# Altium PCB Temp Sensirion assy FPC.PcbDoc
Units mm, origin at the board's own origin, x right, y up, seen from the top; angles counter-clockwise.
Board outline 52.31 x 81.5 mm, 2 copper layers (Top Layer, Bottom Layer), stack 1 mm thick; 2 components, 4 nets, 16 pads, 5 vias.
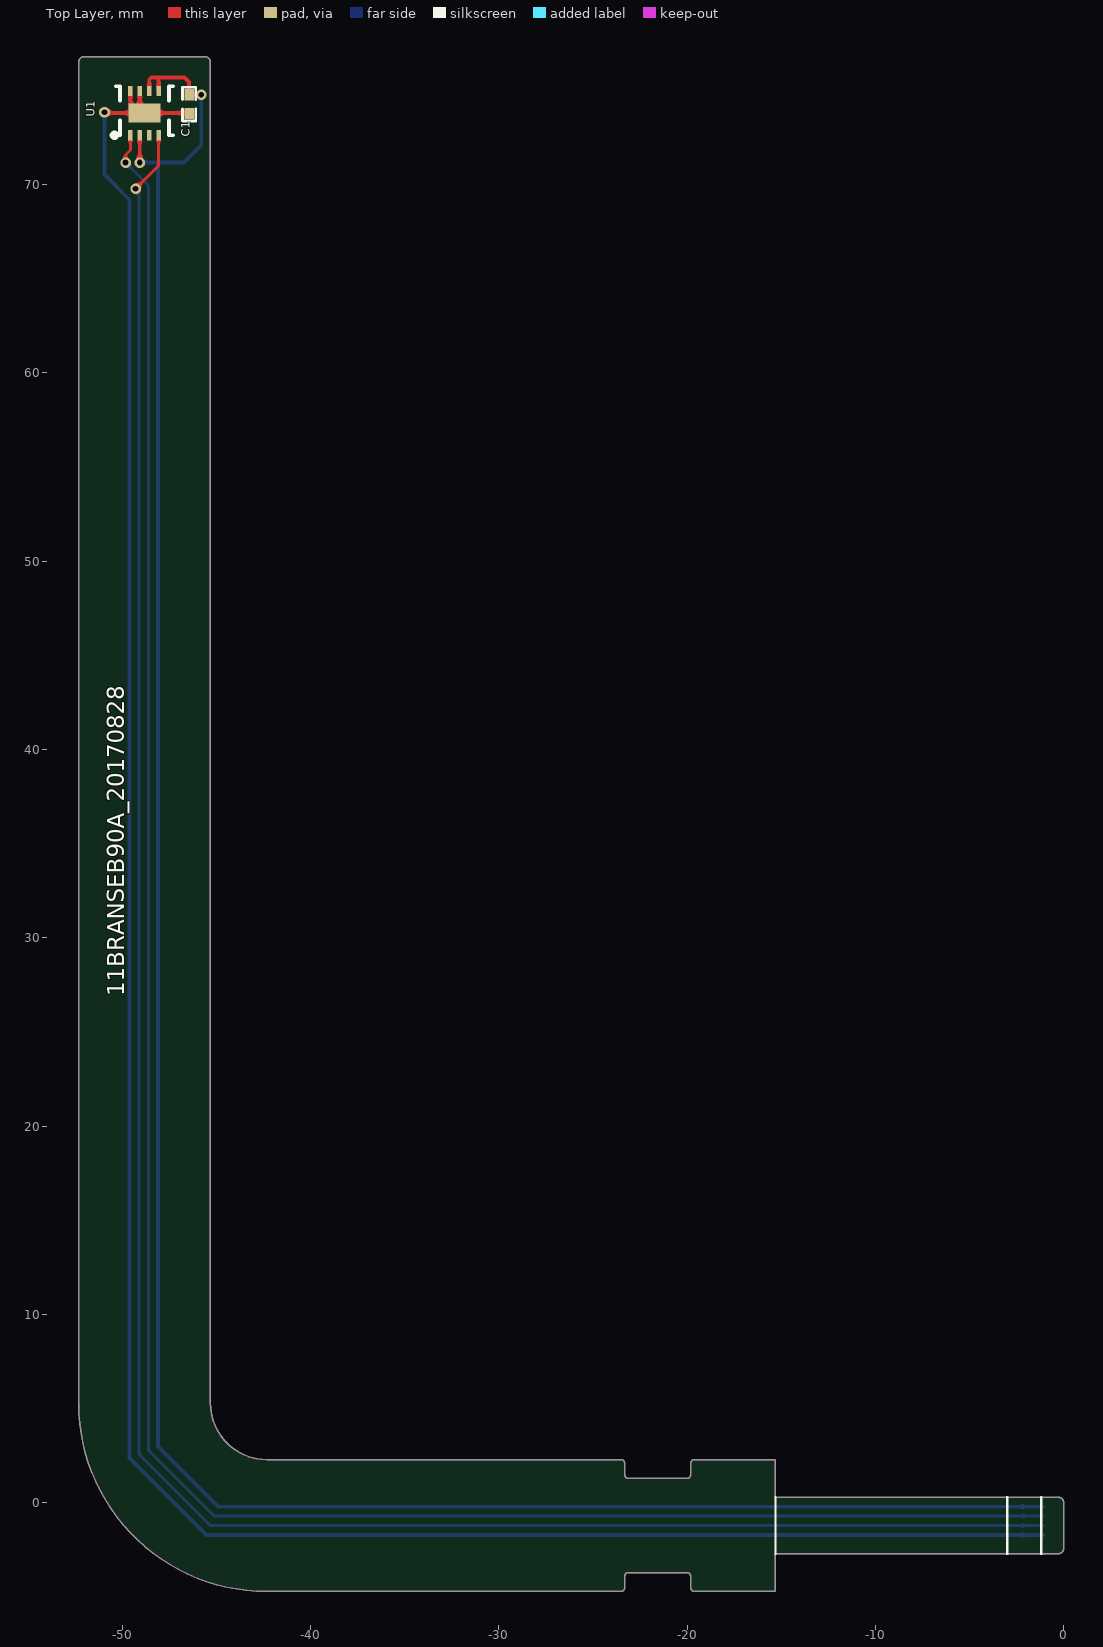
[diagram p0: Top Layer view]
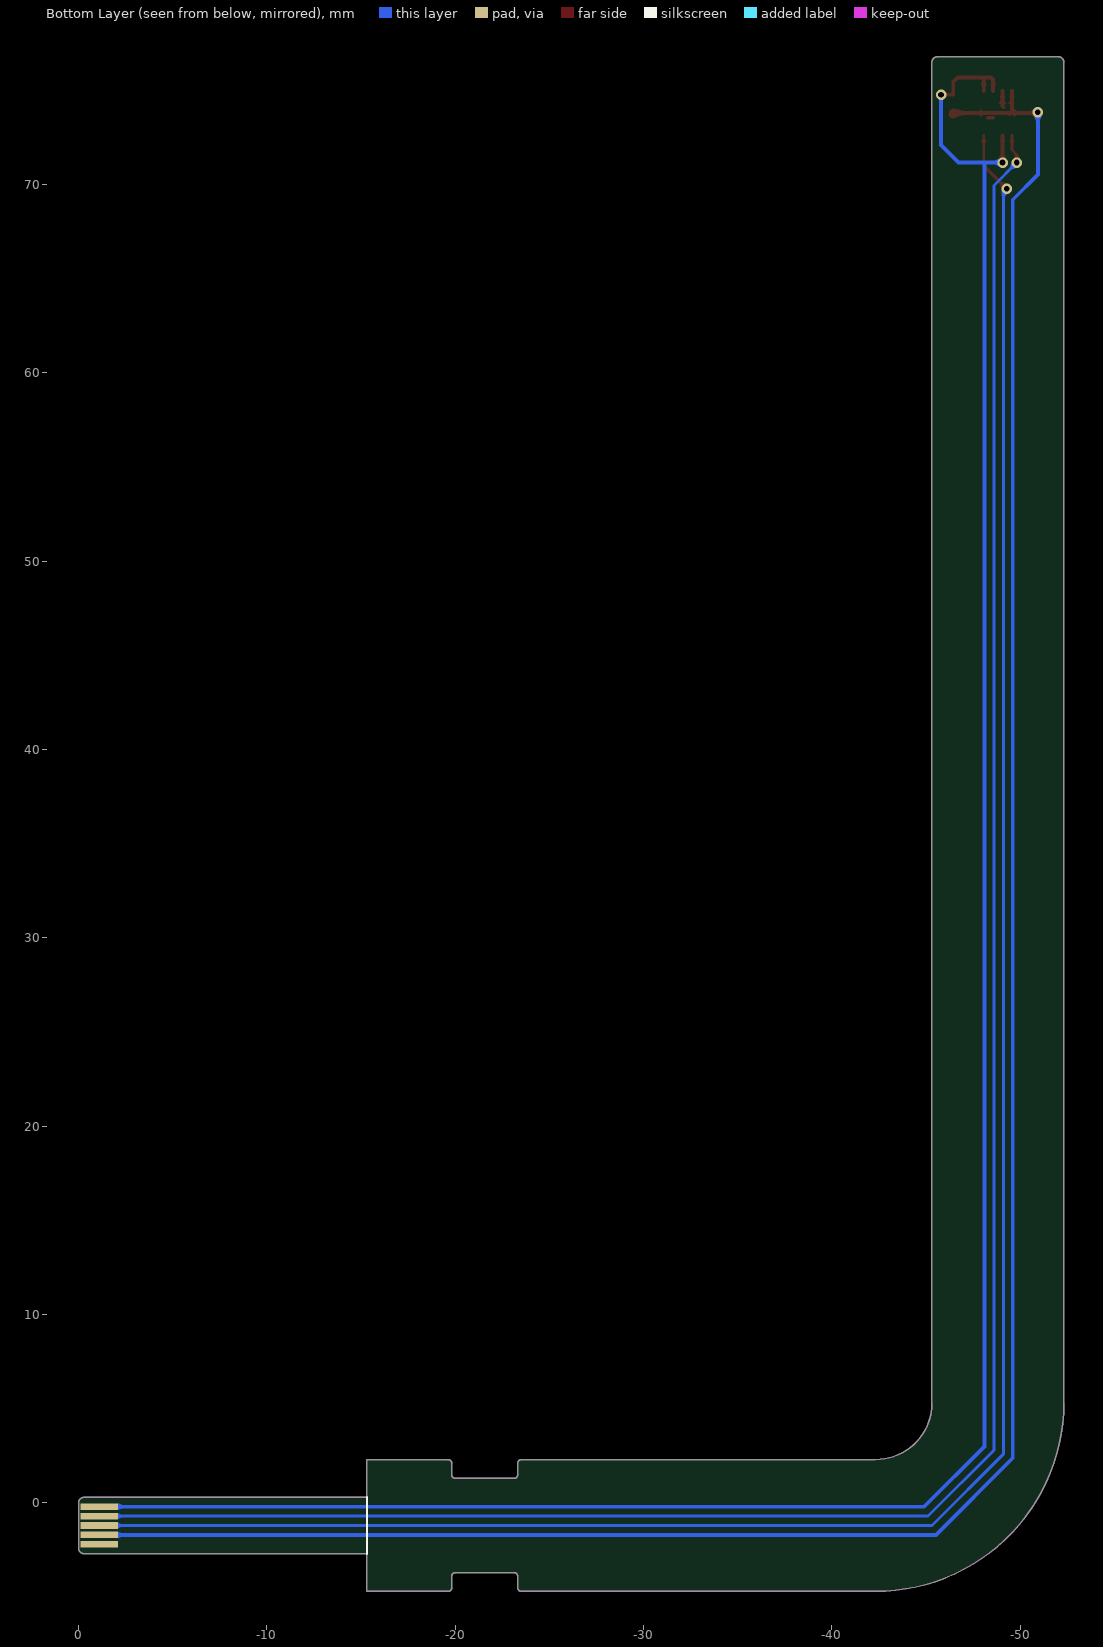
[diagram p1: Bottom Layer view, seen from below]

## Layer stack, top to bottom
Top Solder: solder mask 0.0102, Solder Resist, Dk 3.5
Top Layer: signal copper 0.0356
Dielectric1: core 0.929, FR-4, Dk 4.8
Bottom Layer: signal copper 0.0356
Bottom Solder: solder mask 0.0102, Solder Resist, Dk 3.5

## Board outline
-42.314,-4.7 -23.514,-4.7 ccw(c-23.514,-4.5) -23.314,-4.5 -23.314,-3.9 cw(c-23.114,-3.9) -23.114,-3.7 -20.014,-3.7 cw(c-20.014,-3.9) -19.814,-3.9 -19.814,-4.5 ccw(c-19.614,-4.5) -19.614,-4.7 -15.314,-4.7 -15.314,-2.7 -0.3,-2.7 ccw(c-0.3,-2.4) 0,-2.4 0,0 ccw(c-0.3,0) -0.3,0.3 -15.314,0.3 -15.314,2.3 -19.614,2.3 ccw(c-19.614,2.1) -19.814,2.1 -19.814,1.5 cw(c-20.014,1.5) -20.014,1.3 -23.114,1.3 cw(c-23.114,1.5) -23.314,1.5 -23.314,2.1 ccw(c-23.514,2.1) -23.514,2.3 -42.314,2.3 cw(c-42.314,5.3) -45.314,5.3 -45.314,76.5 ccw(c-45.614,76.5) -45.614,76.8 -52.014,76.8 ccw(c-52.014,76.5) -52.314,76.5 -52.314,5.3 ccw(c-42.314,5.3)

## Design rules (kind name [scope] priority, off if disabled: settings)
Clearance [All] p1: gap=0.152
MinimumSolderMaskSliver [All] p1: minsoldermaskwidth=0
PlaneConnect [All] p1: planeconnectstyle=Relief reliefexpansion=0.508 reliefentries=2 reliefconductorwidth=0.254 reliefairgap=0.254
PolygonConnect [All] p1: connectstyle=Direct reliefconductorwidth=0.254 reliefentries=4 polygonreliefangle="90 Angle" airgapwidth=0.254
RoutingVias [All] p1: holewidth=0.711 width=1.27 viastyle="Through Hole" minholewidth=0.711 minwidth=1.27 maxholewidth=0.711 maxwidth=1.27
SilkToSilkClearance [All] p1: silktosilkclearance=0
SilkToSolderMaskClearance [IsPad] p1: minsilkscreentomaskgap=0 clearancetoexposedcopper=TRUE
SolderMaskExpansion [All] p1: expansion=0.102
Width [All] p1: maxlimit=2.54 minlimit=0.152 preferedwidth=0.254
26 further rules are at their usual default settings.

## Components (designator, comment, footprint, x,y, rotation, side; value= is the part's Value field where it differs from the comment)
C1 "0.1uF/10V" 0402C -46.443,74.273 r270 top
U1 "SHT31" DFN -48.814,73.8 r0 top locked

## Footprints (in the part's own frame and the unit in brackets; to place one, negate y for a bottom-side part, rotate by r counter-clockwise, add the part's x,y. Pads: shape width x height; smd on the part's side, far side on the other; paste and mask are expansions set on the pad)
0402C [mm]
  rect 0.6x0.5 smd: 1(-0.5,0) 2(0.5,0)
  silkscreen extent -0.9,-0.35 0.9,0.35, body extent -0.51,-0.25 0.51,0.25, height 0.5
DFN [mm]
  rect 0.25x0.55 smd: 1(-0.75,-1.175) 2(-0.25,-1.175) 3(0.25,-1.175) 4(0.75,-1.175) 5(0.75,1.175) 6(0.25,1.175) 7(-0.25,1.175) 8(-0.75,1.175)
  rect 1.7x1 smd: 9(0,0)
  silkscreen extent -1.72,-1.3 1.53,1.43, body extent -1.48,-1.55 1.51,1.55, height 1

## Part data
C1: library part CAP, "厂家：Murata，型号：GRM155R71A104KA01D"
U1: "厂家：盛思睿，型号：SHT31"

## Free pads (board coordinates)
  rect 2x0.35 smd far side: 1(-1.104,-0.2) 2(-1.104,-0.7) 3(-1.104,-1.2) 4(-1.104,-1.7) 5(-1.104,-2.2)

## Via types
v1: diameter 0.559, hole 0.305, Top Layer to Bottom Layer, tented both sides, 5 vias

## Nets (pads, with @x,y where several pads share a name; then routed paths per layer and width w, separated by ;. In a path a pad name is that pad's centre, name@x,y a point inside that pad or via, vN(x,y) a via of type N, cw(c..) or ccw(c..) an arc to the next point about the centre after c; other vN are vias at no path point)
3.3V: C1.1 pad.1 U1.2 U1.5 U1.6 | length 129.2
  Top Layer w0.203: v1(-49.064,71.174) U1.2 ; U1.6 -48.564,75.581 -48.449,75.695 -48.1,75.695 ; U1.5 -48.064,75.659 -48.1,75.695 ; v1(-45.797,74.773) C1.1 -46.443,75.443 -46.695,75.695 -48.1,75.695
  Bottom Layer w0.203: v1(-49.064,71.174) -48.104,71.174 ; v1(-45.797,74.773) -45.797,72.103 -46.726,71.174 -48.104,71.174 ; pad.1 -44.906,-0.2 -48.104,2.998 -48.104,71.174
GND: C1.2 pad.4 U1.7 U1.8 U1.9 | length 129.2
  Top Layer w0.203: v1(-50.939,73.841) -50.898,73.8 U1.9@-49.501,73.8 ; U1.8 -49.564,73.864 U1.9@-49.501,73.8 ; U1.9@-49.44,73.739 U1.9@-49.501,73.8 ; U1.9@-49.122,74.108 -49.064,74.166 U1.7 ; U1.9@-48.564,73.55 U1.9@-48.285,73.55 ; C1.2@-46.47,73.8 U1.9 U1.9@-49.501,73.8
  Top Layer w0.508: C1.2@-46.47,73.8 C1.2
  Bottom Layer w0.203: v1(-50.939,73.841) -50.939,70.535 -49.604,69.2 -49.604,2.377 -45.527,-1.7 pad.4
T_SCL: pad.3 U1.4 | length 120.2
  Top Layer w0.152: v1(-49.288,69.783) -48.064,71.007 U1.4
  Bottom Layer w0.152: v1(-49.288,69.783) -49.104,69.599 -49.104,2.584 -45.32,-1.2 pad.3
T_SDA: pad.2 U1.1 | length 119.4
  Top Layer w0.152: v1(-49.821,71.174) -49.821,71.58 -49.564,71.837 U1.1
  Bottom Layer w0.152: v1(-49.821,71.174) -48.604,69.957 -48.604,2.791 -45.113,-0.7 pad.2
pads on no net: U1.3

## Keep-outs
Keep-Out Layer:
  the board outline again, w0.013

## Silkscreen, mask and mechanical layers (free items; w line width, h text height)
Top Overlay:
  lines w0.127: -15.31,-2.7 -15.31,0.3 ; -3,-2.7 -3,0.3 ; -1.2,-2.7 -1.2,0.3
  text "11BRANSEB90A_20170828" at -49.604,26.9 h1.52 r90
Bottom Overlay:
  lines w0.127: -15.314,-2.7 -15.314,0.3
Mechanical 1:
  circle w0.013: c-48.814,73.8 r0.75
  circle w0.013: c-48.814,73.8 r0.609
  circle w0.013: c-48.814,73.8 r0.426
  region: -59.553,73.8 -60.553,73.667 -60.553,73.933
  region: -59.553,76.8 -60.553,76.667 -60.553,76.933
  region: -48.814,81.477 -49.814,81.344 -49.814,81.611
  region: -45.314,81.477 -46.314,81.344 -46.314,81.611
  region: -15.314,14.15 -16.314,14.017 -16.314,14.284
  region: -21.564,14.15 -22.564,14.017 -22.564,14.284
  region: -45.314,36.477 -46.314,36.343 -46.314,36.61
  region: -15.314,36.477 -16.314,36.343 -16.314,36.61
  region: -67.879,76.8 -68.879,76.667 -68.879,76.933
  region: -67.879,2.3 -68.879,2.167 -68.879,2.433
  region: -15.314,-9.007 -16.314,-9.14 -16.314,-8.873
  region: 0,-9.007 -1,-9.14 -1,-8.873
  lines w0.013: -69.379,2.3 -42.314,2.3 ; -69.379,76.8 -52.314,76.8 ; -67.879,2.3 -67.879,39.55 -67.879,76.8 ; -61.053,73.8 -48.814,73.8 ; -61.053,76.8 -52.314,76.8 ; -59.553,73.8 -59.553,70.3 -59.553,75.3 -59.553,85.265 -59.553,76.8 ; -49.689,72.55 -49.689,72.549 -49.439,72.549 -49.439,72.55 ; -49.689,75.05 -49.689,75.051 -49.439,75.051 -49.439,75.05 ; -49.189,72.55 -49.189,72.549 -48.939,72.549 -48.939,72.55 ; -49.189,75.05 -49.189,75.051 -48.939,75.051 -48.939,75.05 ; -48.814,75.8 -48.814,82.977 ; -48.814,81.477 -52.314,81.477 -47.064,81.477 -33.735,81.477 -45.314,81.477 ; -48.689,72.55 -48.689,72.549 -48.439,72.549 -48.439,72.55 ; -48.689,75.05 -48.689,75.051 -48.439,75.051 -48.439,75.05 ; -48.189,72.55 -48.189,72.549 -47.939,72.549 -47.939,72.55 ; -48.189,75.05 -48.189,75.051 -47.939,75.051 -47.939,75.05 ; -47.564,73.15 -47.563,73.15 -47.563,73.35 -47.564,73.35 ; -47.564,74.25 -47.563,74.25 -47.563,74.45 -47.564,74.45 ; -45.314,36.477 -30.314,36.477 -15.314,36.477 ; -45.314,82.977 -45.314,76.8 ; -21.564,1.3 -21.564,15.65 ; -21.564,14.15 -33.814,14.15 -18.439,14.15 -11.814,14.15 -15.314,14.15 ; -15.314,-10.007 -15.314,-3.469 ; -15.314,-2.7 0,-2.7 0,0.3 -15.314,0.3 ; -15.314,15.65 -15.314,2.3 ; -15.314,37.977 -15.314,2.3 ; -12.314,-9.007 -10.664,-9.007 ; -4.65,-9.007 -3,-9.007 ; 0,-10.007 0,-3.469 ; -52.314,76.8 -52.314,5.3 ccw(c-42.314,5.3) -42.314,-4.7 -23.514,-4.7 ccw(c-23.514,-4.5) -23.314,-4.5 -23.314,-3.9 cw(c-23.114,-3.9) -23.114,-3.7 -20.014,-3.7 cw(c-20.014,-3.9) -19.814,-3.9 -19.814,-4.5 ccw(c-19.614,-4.5) -19.614,-4.7 -15.314,-4.7 -15.314,2.3 ; -52.314,76.8 -45.314,76.8 ; -50.065,73.15 -50.065,73.35 ; -50.065,73.15 -50.064,73.15 ; -50.065,73.35 -50.064,73.35 ; -50.065,74.25 -50.065,74.45 ; -50.065,74.25 -50.064,74.25 ; -50.065,74.45 -50.064,74.45 ; -45.314,76.8 -45.314,5.3 ccw(c-42.314,5.3) -42.314,2.3 ; -42.314,2.3 -23.514,2.3 cw(c-23.514,2.1) -23.314,2.1 -23.314,1.5 ccw(c-23.114,1.5) -23.114,1.3 -20.014,1.3 ccw(c-20.014,1.5) -19.814,1.5 -19.814,2.1 cw(c-19.614,2.1) -19.614,2.3 -15.314,2.3 ; -50.064,72.55 -50.064,75.05 -47.564,75.05 -47.564,72.55 -50.064,72.55
  text "3.50" at -40.735,84.602 h2.5
  text "3.00" at -62.678,78.265 h2.5 r90
  text "30.00" at -30.314,39.602 h2.5
  text "74.50" at -71.004,39.55 h2.5 r90
  text "6.25" at -26.814,17.275 h2.5
  text "15.31" at -7.657,-10.257 h2.5